# Altium PCB UPS.PcbDoc
Units mm, origin at the board's own origin, x right, y up, seen from the top; angles counter-clockwise.
Board outline 100 x 62 mm, 4 copper layers (Top Layer, PWR, GND, Bottom Layer), stack 0.568 mm thick; 105 components, 61 nets, 366 pads, 13 vias.
Unrouted connection lines stored in the file: 181.
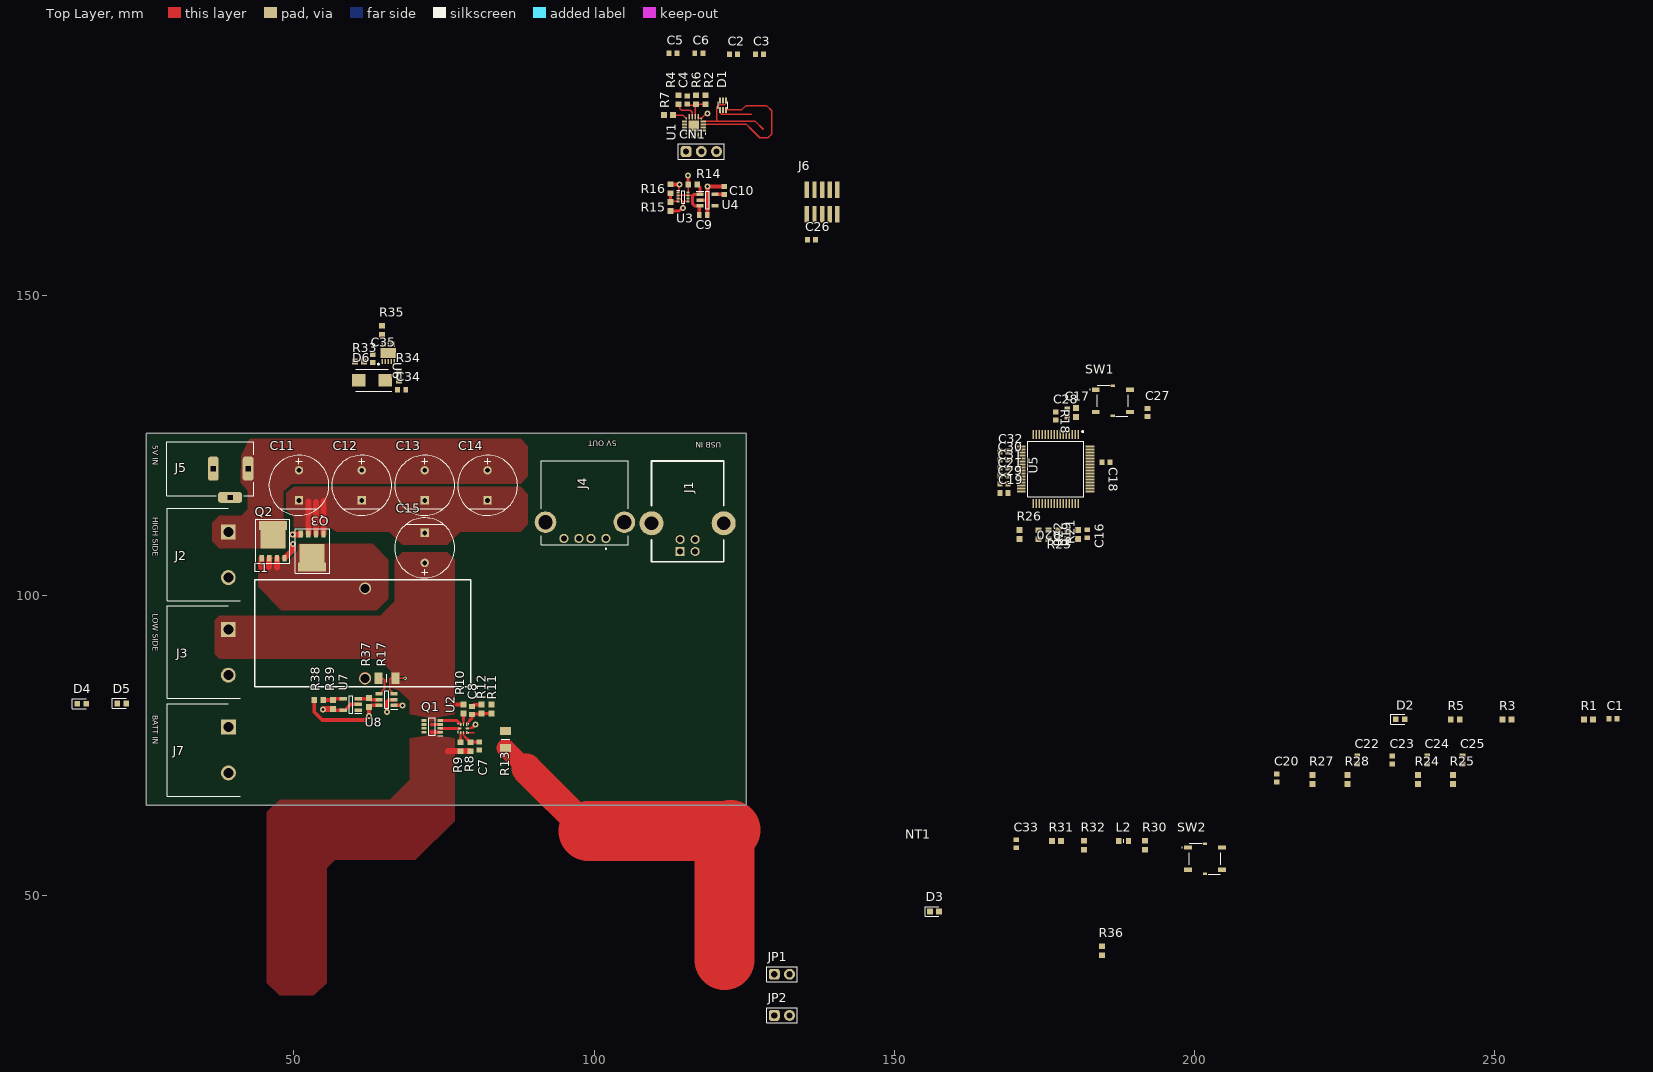
[diagram p0: Top Layer view]
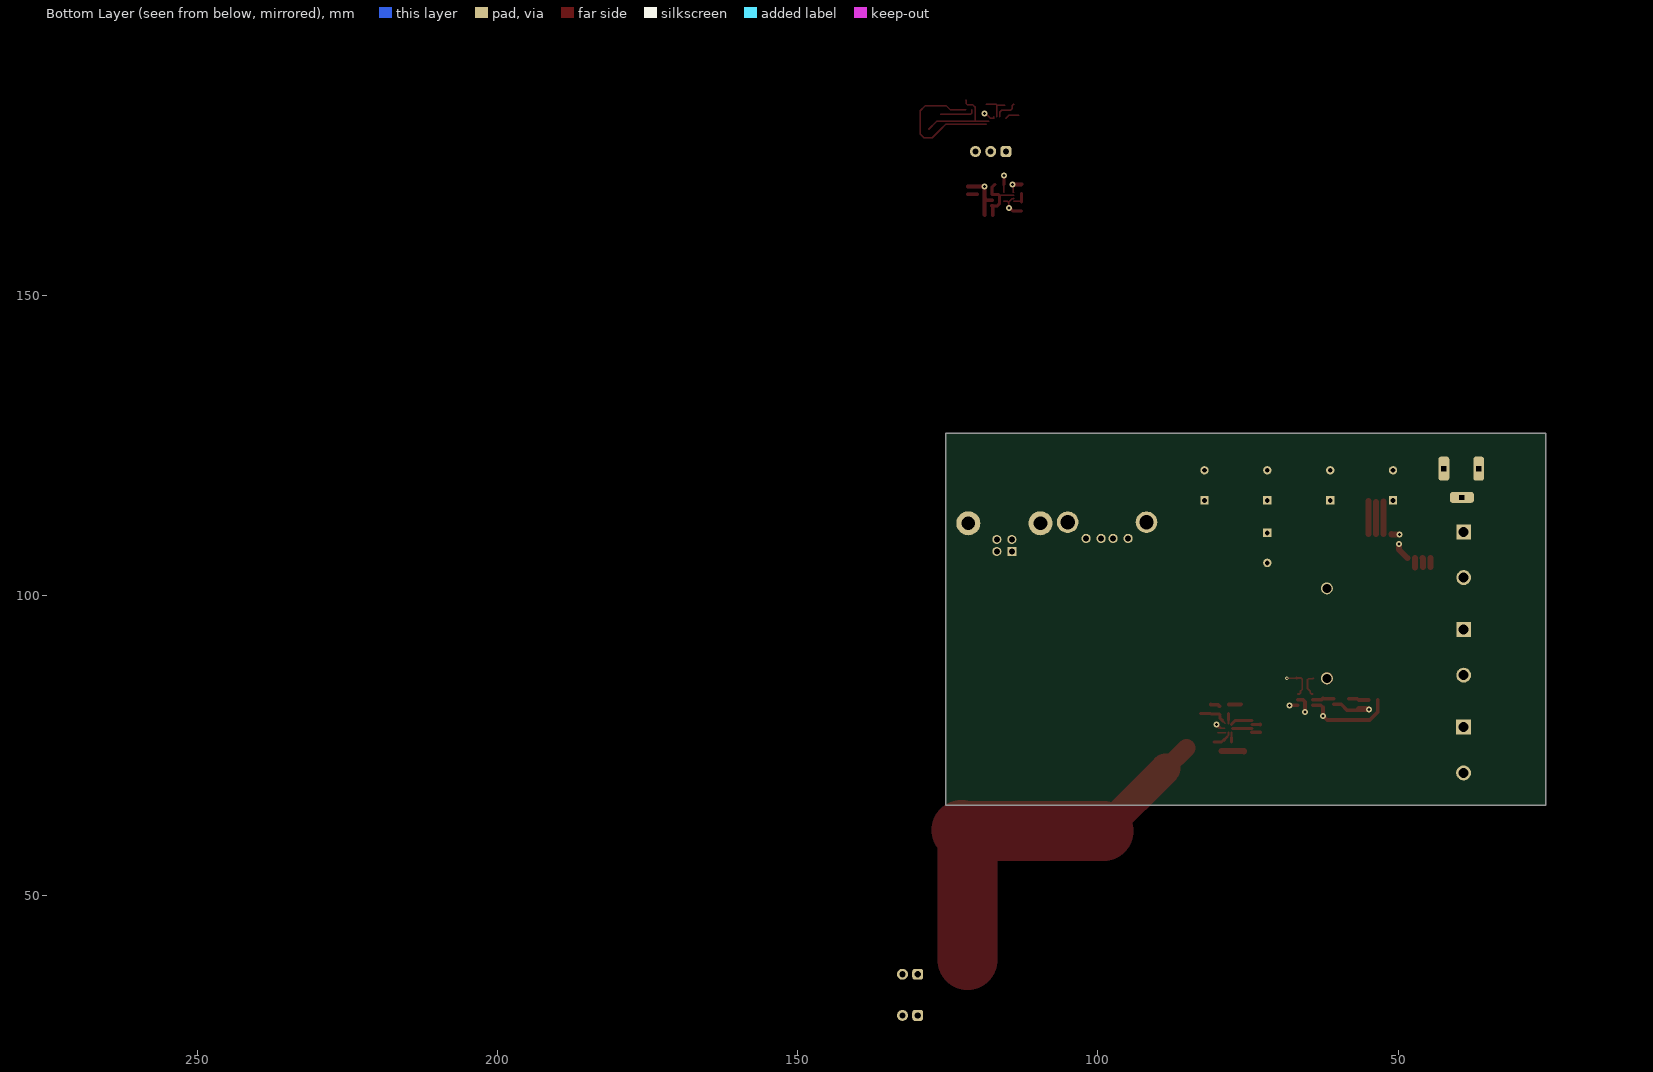
[diagram p1: Bottom Layer view, seen from below]
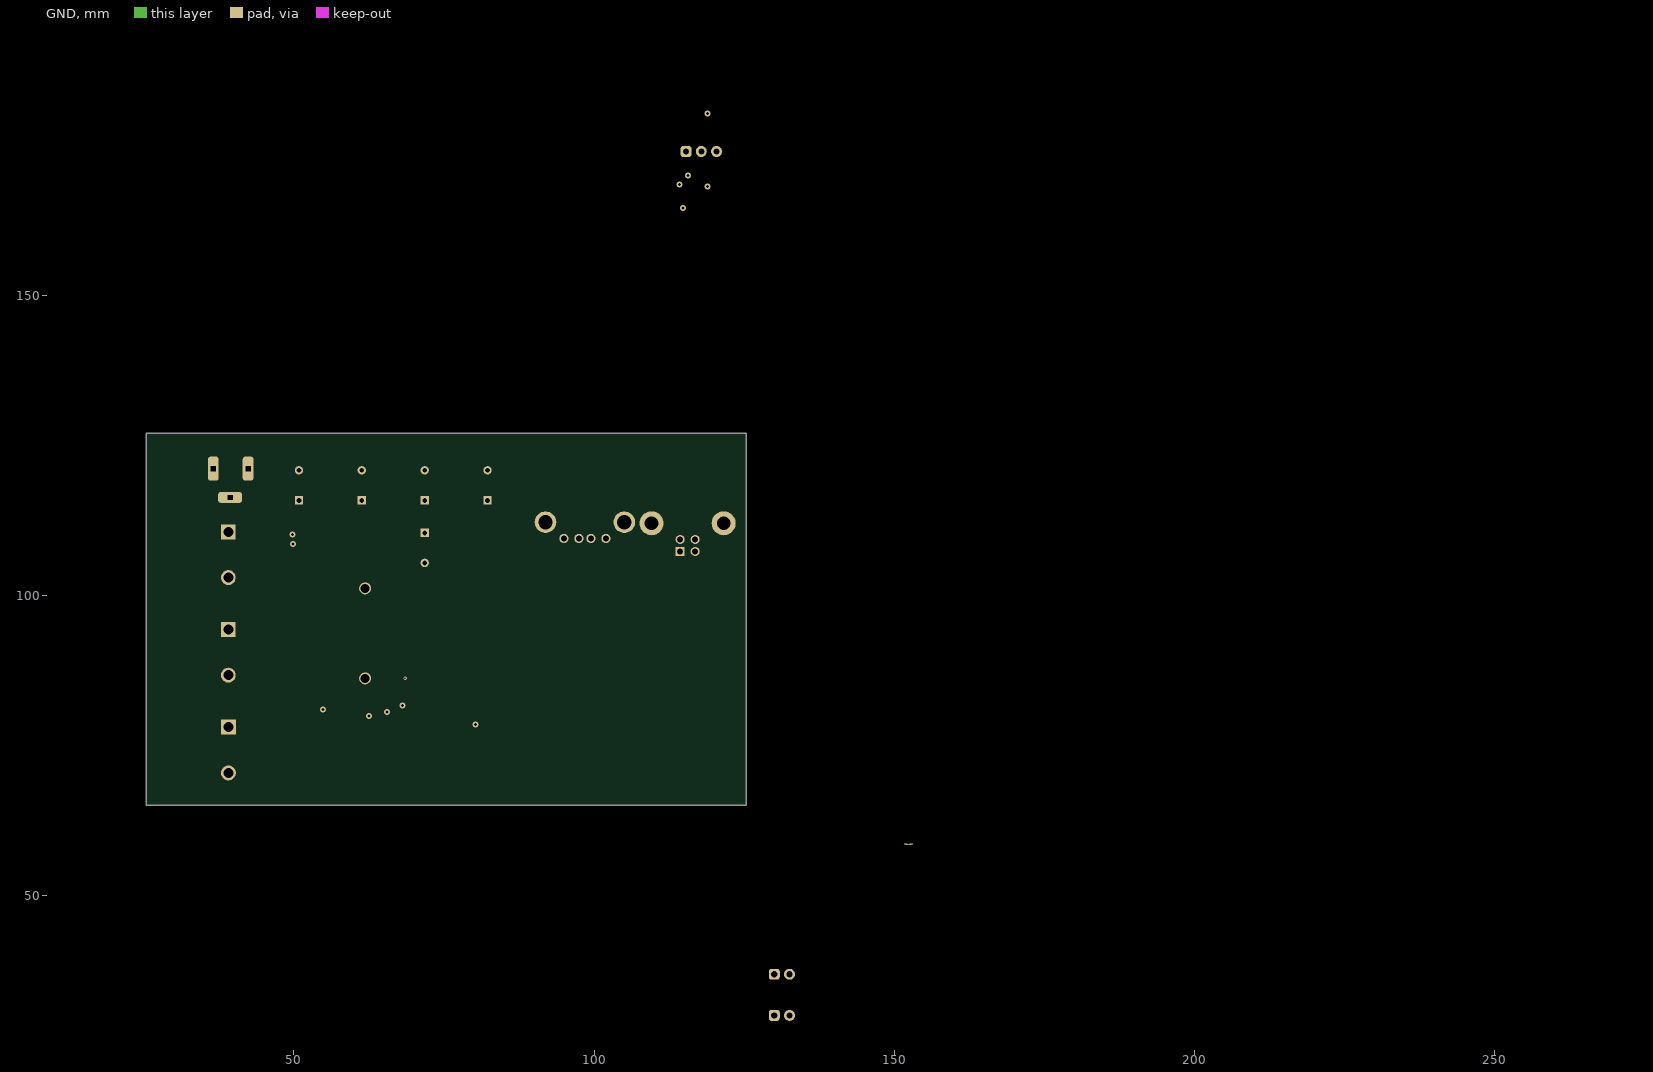
[diagram p2: GND]

## Layer stack, top to bottom
Top Solder: solder mask 0.0102, Solder Resist, Dk 3.5
Top Layer: signal copper 0.0356
Dielectric 2: prepreg 0.0711, PP-006, Dk 4.1
PWR: signal copper 0.0175
Dielectric 1: dielectric 0.32, FR-4, Dk 4.8
GND: signal copper 0.0175
Dielectric 3: prepreg 0.0711, PP-006, Dk 4.1
Bottom Layer: signal copper 0.0356
Bottom Solder: solder mask 0.0102, Solder Resist, Dk 3.5

## Board outline
25.4,65 25.4,127 125.4,127 125.4,65

## Design rules (kind name [scope] priority, off if disabled: settings)
Clearance [All] p1: gap=0.254 ignorepadtopadclearanceinfootprint=FALSE except(0.127: Arc-Arc Arc-Track Arc-SMDPad Track-Track Track-SMDPad SMDPad-SMDPad)
Height [All] p1: minheight=0 maxheight=40 prefheight=12.7
HoleSize [All] p1: absolutevalues=TRUE maxlimit=2.54 minlimit=0.3 maxpercent=80.000 minpercent=20.000
PlaneConnect [All] p1: planeconnectstyle=Direct reliefexpansion=0.508 reliefentries=4 reliefconductorwidth=0.254 reliefairgap=0.254
PolygonConnect [All] p1: connectstyle=Direct reliefconductorwidth=0.254 reliefentries=4 polygonreliefangle="90 Angle" airgapwidth=0.127
RoutingVias [All] p1: holewidth=0.5 width=0.75 viastyle="Through Hole" minholewidth=0.3 minwidth=0.5 maxholewidth=1 maxwidth=1.5
SolderMaskExpansion [All] p1: expansion=0.102 istentingtop=FALSE
SupplyNets "Schematic Supply Nets_10" [InNet('Vusb')] p1: voltage=0.000
SupplyNets "Schematic Supply Nets_9" [InNet('+3V3A')] p2: voltage=0.000
SupplyNets "Schematic Supply Nets_3" [InNet('+1V2')] p3: voltage=0.000
SupplyNets "Schematic Supply Nets_2" [InNet('AGND')] p4: voltage=0.000
SupplyNets "Schematic Supply Nets_8" [InNet('Vswitch')] p5: voltage=0.000
SupplyNets "Schematic Supply Nets_7" [InNet('+5V')] p6: voltage=0.000
SupplyNets "Schematic Supply Nets_6" [InNet('+3V3')] p7: voltage=0.000
SupplyNets "Schematic Supply Nets_1" [InNet('Vip')] p8: voltage=0.000
SupplyNets "Schematic Supply Nets_5" [InNet('Vbatt-')] p9: voltage=0.000
SupplyNets "Schematic Supply Nets_4" [InNet('Vbatt+')] p10: voltage=0.000
SupplyNets "Schematic Supply Nets" [InNet('GND')] p11: voltage=0.000
UnRoutedNet [All] p1: checkbadconnections=TRUE
Width [All] p1: maxlimit=10 minlimit=0.2 preferedwidth=0.254 midlayer1_minwidth=0.254 midlayer1_maxwidth=0.254 midlayer2_minwidth=0.254 midlayer2_maxwidth=0.254 minimp=50.000000 maximp=50.000000 favimp=50.000000
26 further rules are at their usual default settings.

## Classes and differential pairs
component class Designator: C11 C12 C13 C14 C15 C19 C20 C34 C35 D6 L1 Q2 Q3 R17 R24 R25 R27 R28 R33 R34 R35 R36 R37 R38 R39 U6 U7 U8

## Components (designator, comment, footprint, x,y, rotation, side; value= is the part's Value field where it differs from the comment)
C1 "4.7nF" CAP0603 269.777,79.423 r0 top
C2 "4.7uF" CAP0603 123.24,190.123 r0 top
C3 "100nF" CAP0603 127.558,190.123 r0 top
C4 "1uF" CAP0603 115.55,182.525 r270 top
C5 "4.7uF" CAP0603 113.144,190.323 r0 top
C6 "100nF" CAP0603 117.462,190.323 r0 top
C7 "100nF" CAP0603 80.875,74.85 r90 top
C8 "100nF" CAP0603 79.675,80.783 r270 top
C9 "1uF" CAP0603 118.2,163.35 r180 top
C10 "1uF" CAP0603 121.7,167.45 r270 top
C11 "RNU0J152MDN1PH" "Aluminium Capacitor 10x12.5" 45.878,113.3 r90 top value=1500uF
C12 "RNU0J152MDN1PH" "Aluminium Capacitor 10x12.5" 56.35,113.3 r90 top value=1500uF
C13 "RNU0J152MDN1PH" "Aluminium Capacitor 10x12.5" 66.825,113.3 r90 top value=1500uF
C14 "RNU0J152MDN1PH" "Aluminium Capacitor 10x12.5" 77.3,113.3 r90 top value=1500uF
C15 "470uF" "Aluminium Capacitor 10x12.5" 76.731,112.868 r270 top
C16 "4.7uF" CAP0603 182.2,110.225 r90 top
C17 "4.7uF" CAP0603 178.85,130.35 r270 top
C18 "4.7uF" CAP0603 185.305,122.125 r180 top
C19 "47nF" CAP0603 168.325,117.025 r0 top
C20 "47nF" CAP0603 213.77,69.517 r90 top
C21 "4.7uF" CAP0603 168.3,119.925 r0 top
C22 "4.7uF" CAP0603 227.185,72.503 r90 top
C23 "100nF" CAP0603 233.01,72.503 r90 top
C24 "100nF" CAP0603 238.86,72.503 r90 top
C25 "100nF" CAP0603 244.711,72.503 r90 top
C26 "100nF" CAP0603 136.225,159.2 r180 top
C27 "100nF" CAP0603 192.225,130.425 r90 top
C28 "4.7uF" CAP0603 176.925,129.87 r270 top
C29 "4.7nF" CAP0603 168.3,118.55 r0 top
C30 "4.7nF" CAP0603 168.3,122.575 r0 top
C31 "4.7nF" CAP0603 168.3,121.25 r0 top
C32 "4.7nF" CAP0603 168.325,123.925 r0 top
C33 "10uF" CAP0603 170.357,58.578 r90 top
C34 "1uF" CAP0603 67.95,134.225 r180 top
C35 "1uF" CAP0603 63.15,139.425 r270 top
CN1 "Pins 1x3" PIN-1X3 117.875,173.925 r0 top
D1 "ESDAULC6-3BP6" SOT-666 121.5,181.65 r0 top
D2 "Value" LED0603 234.344,79.296 r0 top
D3 "Value" LED0603 156.731,47.277 r0 top
D4 "Value" LED0603 14.632,81.903 r0 top
D5 "Value" LED0603 21.282,81.953 r0 top
D6 "Value" SMB 63,135.8 r180 top
J1 "USB-B" USB-B-FEMALE 115.6,107.275 r180 top
J2 "1766233" "GMSTBA 2,5/ 2-G-7,62" 39.059,110.54 r90 top
J3 "1766233" "GMSTBA 2,5/ 2-G-7,62" 39.059,94.284 r90 top
J4 "USB-A" USB-A-FEMALE 101.98,109.44 r180 top
J5 "DC Power Jack" "DC Power Jack Right Angled" 36.011,121.081 r270 top
J6 "FTSH-105-01-L-DV-K" CON-2x5-1.27 138.005,163.48 r0 top
J7 "1766233" "GMSTBA 2,5/ 2-G-7,62" 39.075,78 r90 top
JP1 "Jumper" PIN-1X2 131.306,36.827 r0 top
JP2 "Jumper" PIN-1X2 131.306,29.976 r0 top
L1 "Inductor" COIL_HANDMADE 61.85,93.625 r270 top value="174 uH"
L2 "Inductor" IND0603 188.258,59.053 r0 top value=10uH
NT1 "NetTie_1-1" NETTIE_1-1_0.2MM 152.4,58.525 r180 top net-tie value="NetTie 1-1 0.2mm"
Q1 "ECH8695R-TL-W" SOT-28FL 73.025,78.125 r180 top
Q2 "N-MOSFET" SOT-669-5 46.525,108.875 r0 top
Q3 "N-MOSFET" SOT-669-5 53.025,107.45 r180 top
R1 "1M" RES0603 265.713,79.296 r0 top
R2 "22K1" RES0603 118.575,182.55 r90 top
R3 "330R" RES0603 252.124,79.296 r0 top
R4 "1K" RES0603 114.05,182.55 r270 top
R5 "330R" RES0603 243.488,79.296 r0 top
R6 "47K5" RES0603 117,182.55 r270 top
R7 "10K" RES0603 112.425,179.975 r0 top
R8 "100R" RES0603 79.377,74.75 r270 top
R9 "20R" RES0603 77.75,74.75 r270 top
R10 "1K" RES0603 78.225,81.033 r90 top
R11 "100R" RES0603 82.875,81.033 r90 top
R12 "1K" RES0603 81.225,81.033 r270 top
R13 "0R005" RES1206 85.25,75.95 r90 top
R14 "10K" RES0603 116.45,168.45 r180 top
R15 "10K" RES0603 112.75,164.775 r270 top
R16 "10K" RES0603 112.75,167.7 r270 top
R17 "0R005" RES1206 65.5,86.15 r0 top
R18 "2K7" RES0603 180.325,130.425 r90 top
R19 "4K7" RES0603 180.625,110.1 r270 top
R20 "4K7" RES0603 178.925,110.1 r270 top
R21 "4K7" RES0603 177.325,110.075 r270 top
R22 "4K7" RES0603 175.75,110.05 r270 top
R23 "4K7" RES0603 174.1,110.05 r270 top
R24 "2K7" RES0603 237.265,69.263 r90 top
R25 "2K7" RES0603 243.107,69.263 r90 top
R26 "4K7" RES0603 170.925,110.1 r270 top
R27 "4K7" RES0603 219.739,69.263 r90 top
R28 "4K7" RES0603 225.581,69.263 r90 top
R30 "330R" RES0603 191.833,58.328 r90 top
R31 "330R" RES0603 177.057,59.053 r0 top
R32 "330R" RES0603 181.657,58.328 r90 top
R33 "5R" RES0603 60.925,138.925 r0 top
R34 "5R" RES0603 67.5,136.525 r270 top
R35 "5R" RES0603 64.7,144.125 r90 top
R36 "10K" RES0603 184.633,40.727 r90 top
R37 "100R" RES0603 62.5,82.1 r90 top
R38 "10K" RES0603 54.125,82.525 r180 top
R39 "10K" RES0603 56.525,81.775 r90 top
SW1 "PTS526 Button" "PTS526 SMG15J SMTR2 LFS" 186.45,132.375 r0 top
SW2 "PTS526 Button" "PTS526 SMG15J SMTR2 LFS" 201.808,56.077 r0 top
U1 "CP2102N-A02-GQFN20R" QFN-20 116.625,178.175 r180 top
U2 "BQ2980" X2QFN-8 78.25,77.8 r90 top
U3 "TPS2116" SOTFL50P160X60-8N 114.85,166.35 r0 top
U4 "LP5907QMFX-3.3Q1" SOT23-5 118.9,165.825 r0 top
U5 "F280038PMRQ1" LQFP-64 176.925,121.025 r270 top
U6 "DGD05473FN-7" V-DFN3030-10 65.725,140.35 r90 top
U7 "TV431" SOT23-5 59.475,81.8 r180 top
U8 "INA181A1" SOT23-6 65.45,82.6 r180 top

## Footprints (in the part's own frame and the unit in brackets; to place one, negate y for a bottom-side part, rotate by r counter-clockwise, add the part's x,y. Pads: shape width x height; smd on the part's side, far side on the other; paste and mask are expansions set on the pad)
"Aluminium Capacitor 10x12.5" [mm]
  rect 1.4x1.4 hole 0.8: 1(2.493,-4.953)
  round 1.4 hole 0.8: 2(7.493,-4.953)
  silkscreen extent -0.01,-9.95 9.99,0.04, body extent -0.02,-9.96 9.98,0.03, height 12.5
CAP0603 [mm] "1.6 x 0.8 x 0.8 mm"
  rect 0.81x0.94 smd: 1(-0.67,0) 2(0.67,0)
  body extent -0.8,-0.4 0.8,0.4, height 0.9
COIL_HANDMADE [mm] "35 x 15 mm coil"
  round 2 hole 1.5: 1(-7.5,0) 2(7.5,0)
  silkscreen extent -8.9,-18.4 8.9,17.6, body extent -8,-17.9 7.8,17.1, height 37.5
CON-2x5-1.27 [mm] "2x5 pin connector with 1.27 mm pitch"
  rect 0.74x2.79 smd: 1(-2.54,0) 2(-2.54,4.07) 3(-1.27,0) 4(-1.27,4.07) 5(0,0) 6(0,4.07) 7(1.27,0) 8(1.27,4.07) 9(2.54,0) 10(2.54,4.07)
  silkscreen extent -2.6,-2.25 -2.5,-2.15, body extent -3.17,-0.92 3.17,4.93, height 6.13
"DC Power Jack Right Angled" [mm] "DC Power Jack Right Angled(6.4)"
  rrect50% 4x1.8 hole 0.8 square: 1(0,6.35) 2(0,0.55)
  rrect50% 1.8x4 hole 0.8 square: 3(4.8,3.35)
  silkscreen extent -4.5,-7.25 4.5,7.25, body extent -4.5,-7.25 5,7.25, height 10.75
"GMSTBA 2,5/ 2-G-7,62" [mm] "Phoenix Xontact PCB header,"
  rect 2.475x2.475 hole 1.65: 1(0,0)
  round 2.475 hole 1.65: 2(-7.62,0)
  silkscreen extent -11.48,-2 3.91,10.15, body extent -11.41,-1.92 3.83,10.08, height 8.9
IND0603 [mm]
  rect 0.9x1 smd: 1(-0.8,0) 2(0.8,0)
  silkscreen extent 0,-0.3 0,0.3, body extent -0.8,-0.4 0.8,0.4, height 0.95
LED0603 [mm] "LEDC1608X80N"
  rect 0.95x0.95 smd: 1(-0.75,0) 2(0.75,0)
  silkscreen extent -1.58,-0.82 0.75,0.82, body extent -0.83,-0.4 0.77,0.4, height 0.7
LQFP-64 [mm] "QFP50P1200X1200X160-64N"
  rect 1.475x0.3 smd: 1(-5.738,3.75) 2(-5.738,3.25) 3(-5.738,2.75) 4(-5.738,2.25) 5(-5.738,1.75) 6(-5.738,1.25) 7(-5.738,0.75) 8(-5.738,0.25) 9(-5.738,-0.25) 10(-5.738,-0.75) 11(-5.738,-1.25) 12(-5.738,-1.75) 13(-5.738,-2.25) 14(-5.738,-2.75) 15(-5.738,-3.25) 16(-5.738,-3.75) 33(5.738,-3.75) 34(5.738,-3.25) 35(5.738,-2.75) 36(5.738,-2.25) 37(5.738,-1.75) 38(5.738,-1.25) 39(5.738,-0.75) 40(5.738,-0.25) 41(5.738,0.25) 42(5.738,0.75) 43(5.738,1.25) 44(5.738,1.75) 45(5.738,2.25) 46(5.738,2.75) 47(5.738,3.25) 48(5.738,3.75)
  rect 0.3x1.475 smd: 17(-3.75,-5.738) 18(-3.25,-5.738) 19(-2.75,-5.738) 20(-2.25,-5.738) 21(-1.75,-5.738) 22(-1.25,-5.738) 23(-0.75,-5.738) 24(-0.25,-5.738) 25(0.25,-5.738) 26(0.75,-5.738) 27(1.25,-5.738) 28(1.75,-5.738) 29(2.25,-5.738) 30(2.75,-5.738) 31(3.25,-5.738) 32(3.75,-5.738) 49(3.75,5.738) 50(3.25,5.738) 51(2.75,5.738) 52(2.25,5.738) 53(1.75,5.738) 54(1.25,5.738) 55(0.75,5.738) 56(0.25,5.738) 57(-0.25,5.738) 58(-0.75,5.738) 59(-1.25,5.738) 60(-1.75,5.738) 61(-2.25,5.738) 62(-2.75,5.738) 63(-3.25,5.738) 64(-3.75,5.738)
  silkscreen extent -6.35,-4.65 4.65,4.65, body extent -6.01,-6.01 6.01,6.01, height 1.5
NETTIE_1-1_0.2MM [mm]
  rrect5% 0.6x0.2 on Mid2 paste-0.45 mask-0.45: 1(-0.45,0) 2(0.45,0)
  GND lines w0.2: 0.45,0 -0.45,0
PIN-1X2 [mil] "2.54mm"
  rrect50% 72x72 hole 40: 1(-50,0)
  round 72 hole 40: 2(50,0)
  silkscreen extent -100,-50 100,50, body extent -96,-48 104,50, height 323
PIN-1X3 [mil] "2.54mm"
  rrect50% 72x72 hole 40: 1(-100,0)
  round 72 hole 40: 2(0,0) 3(100,0)
  silkscreen extent -150,-50 150,50, body extent -146,-49 154,49, height 323
"PTS526 SMG15J SMTR2 LFS" [mm] "Tactile Switches 50mA 12VDC, 5.2x5.2mm, 1.5mm H, metal actuator"
  rect 1.3x0.7 smd: 1(-2.85,1.85) 1(2.85,1.85) 2(-2.85,-1.85) 2(2.85,-1.85)
  rect 0.7x0.4 smd: 3(0,-2.5) 3(0,2.5)
  silkscreen extent -3.85,-2.6 2.6,2.6, body extent -3.2,-2.6 3.2,2.6, height 1.7
QFN-20 [mm]
  rect 0.3x0.3 smd: 1(-1.25,1.25) 6(-1.25,-1.25) 11(1.25,-1.25) 16(1.25,1.25)
  rect 0.9x0.3 smd: 2(-1.55,0.75) 3(-1.55,0.25) 4(-1.55,-0.25) 5(-1.55,-0.75) 12(1.55,-0.75) 13(1.55,-0.25) 14(1.55,0.25) 15(1.55,0.75)
  rect 0.3x0.9 smd: 7(-0.75,-1.55) 8(-0.25,-1.55) 9(0.25,-1.55) 10(0.75,-1.55) 17(0.75,1.55) 18(0.25,1.55) 19(-0.25,1.55) 20(-0.75,1.55)
  rect 1.8x1.8 smd: 21(0,0)
  silkscreen extent -2,1.25 -1.9,1.35, body extent -1.5,-1.5 1.5,1.5, height 0.75
RES0603 [mm] "Resistor 0603 (1608 metric)"
  rect 0.95x1 smd: 1(-0.75,0) 2(0.75,0)
  body extent -0.76,-0.43 0.76,0.43, height 0.45
RES1206 [mm]
  rect 1.35x1.85 smd: 1(-1.4,0) 2(1.4,0)
  silkscreen extent 0,-0.7 0,0.7, body extent -1.6,-0.8 1.6,0.8, height 0.65
SMB [mm] "DO-214AA"
  rect 2.2x2.15 smd: 1(-2.2,0) 2(2.2,0)
  silkscreen extent -3.27,-1.81 2.7,1.81, body extent -2.7,-1.81 2.7,1.81, height 2.44
SOT23-5 [mm]
  rect 1.2x0.6 smd: 1(-1.25,0.95) 2(-1.25,0) 3(-1.25,-0.95) 4(1.25,-0.95) 5(1.25,0.95)
  silkscreen extent -1.85,-1.45 0.3,1.5, body extent -1.4,-1.45 1.4,1.45, height 1.45
SOT23-6 [mm]
  rect 1.15x0.6 smd: 1(-1.25,0.95) 2(-1.25,0) 3(-1.25,-0.95) 4(1.25,-0.95) 5(1.25,0) 6(1.25,0.95)
  silkscreen extent -1.83,-1.45 0.33,1.6, body extent -1.4,-1.45 1.4,1.45, height 1.45
SOT-28FL [mm] "SOT-28FL / ECH8 / SOT65P280X95-8N"
  rect 0.9x0.45 smd: 1(-1.35,0.975) 2(-1.35,0.325) 3(-1.35,-0.325) 4(-1.35,-0.975) 5(1.35,-0.975) 6(1.35,-0.325) 7(1.35,0.325) 8(1.35,0.975)
  silkscreen extent -1.8,-1.45 0.55,1.55, body extent -1.4,-1.45 1.4,1.45, height 0.95
SOT-666 [mm]
  rect 0.3x0.99 smd: 1(-0.5,-0.805) 2(0,-0.805) 3(0.5,-0.805) 4(0.5,0.805) 5(0,0.805) 6(-0.5,0.805)
  silkscreen extent -0.8,-0.6 0.8,0.6, body extent -0.8,-1.27 0.8,1.27, height 0.7
SOT-669-5 [mm] "LFPAK56; PowerSO8 (SOT669)"
  rect 0.7x1.15 smd: 1(1.905,-2.725) 2(-1.905,-2.725) 2(-0.635,-2.725) 2(0.635,-2.725)
  rect 4.2x3.1 smd: 3(0,0.45)
  rect 4.7x1.5 smd: 3(0,2.75)
  silkscreen extent -2.9,-3.6 2.8,3.8, body extent -2.4,-2.81 2.4,3.3, height 1
SOTFL50P160X60-8N [mm]
  rect 0.475x0.3 smd: 1(-0.838,0.75) 2(-0.838,0.25) 3(-0.838,-0.25) 4(-0.838,-0.75) 5(0.838,-0.75) 6(0.838,-0.25) 7(0.838,0.25) 8(0.838,0.75)
  silkscreen extent -1.07,-1.05 0.25,1.15, body extent -0.8,-1.05 0.8,1.05, height 0.6
USB-A-FEMALE [mm] "SS-52100-001"
  round 1.53 hole 1.02: 1(0,0) 2(2.5,0) 3(4.5,0) 4(7,0)
  round 3.6 hole 2.4: 5(-3.07,-2.71) 5(10.07,-2.71)
  silkscreen extent -3.75,-12.99 10.75,1.81, body extent -4.5,-13 11.5,1, height 7.61
USB-B-FEMALE [mm]
  round 4 hole 2.3: 0(-6,-4.7) 0(6,-4.7)
  rect 1.5x1.5 hole 1: 1(1.25,0)
  round 1.5 hole 1: 2(-1.25,0) 3(-1.25,-2) 4(1.25,-2)
  silkscreen extent -6,-15.1 6,1.7, body extent -7.44,-15 7.44,2, height 11
V-DFN3030-10 [mm] "V-DFN3030-10, SON50P300X300X80-11N-D / For DGD05473 IC"
  rect 0.85x0.3 smd: 1(-1.45,1) 2(-1.45,0.5) 3(-1.45,0) 4(-1.45,-0.5) 5(-1.45,-1) 6(1.45,-1) 7(1.45,-0.5) 8(1.45,0) 9(1.45,0.5) 10(1.45,1)
  rect 1.65x2.6 smd: 11(0,0)
  silkscreen extent -2,1.52 -1.75,1.77, body extent -1.55,-1.5 1.55,1.5, height 0.8
X2QFN-8 [mm] "QFN, 8-Leads, Body 1.5x1.5mm, Pitch 0.5mm, TI Recommended"
  rrect40% 0.55x0.25 smd: 1(-0.675,0.5) 3(-0.675,-0.5) 5(0.675,-0.5) 7(0.675,0.5)
  rrect50% 0.55x0.2 smd: 2(-0.675,0) 6(0.675,0)
  rrect33% 0.3x0.6 smd: 4(0,-0.65) 8(0,0.65)
  silkscreen extent -0.85,-0.87 0.85,0.87, body extent -0.78,-0.78 0.77,0.77, height 0.41

## Part data
C1 C2 C3 C4 C5 C6 C7 C8 C9 C10 C16 C17 C18 C19 C20 C21 C22 C23 C24 C25 C26 C27 C28 C29 C30 C31 C32 C34 C35: "Capacitor"
C11 C12 C13 C14: "Aluminum Electrolytic Capacitor, Polarized, Aluminum (solid Polymer), 6.3V, 20% +Tol, 20% -Tol, 1500uF, Through Hole Mount", Capacitor Type=Aluminium, ESR (Equivalent Series Resistance)=7mR, Leakage Current=1.89mA, Manufacturer=Nichicon, Manufacturer Series=NU, Max Operating Temperature=105°C, Min Operating Temperature=-55°C, Package Shape=Cylindrical, Package Style=RadialMeter, Rated DC Voltage (URdc)=6.3V, Ripple Current=6.1A, Supplier Part Number=4133684, Tolerance  (fill in as +-)=20%, Category="Polymer Capacitors", ComponentLink1Description=https://datasheet.ciiva.com:443/pdfs/VipMasterIC/IC/NICH/NICH-S-A0001375683/NICH-S-A0001375683-1.pdf?src-supplier=IHS+Markit, ComponentLink1URL=https://datasheet.ciiva.com:443/pdfs/VipMasterIC/IC/NICH/NICH-S-A0001375683/NICH-S-A0001375683-1.pdf?src-supplier=IHS+Markit, ComponentLink2Description=https://datasheet.ciiva.com/6316/2013fpcap-catalog-nu-6316953.pdf?src-supplier=Digikey, ComponentLink2URL=https://datasheet.ciiva.com/6316/2013fpcap-catalog-nu-6316953.pdf?src-supplier=Digikey, ComponentLink3Description=https://datasheet.ciiva.com/6316/2013fpcap-catalog-nu-6316955.pdf?src-supplier=Digikey, ComponentLink3URL=https://datasheet.ciiva.com/6316/2013fpcap-catalog-nu-6316955.pdf?src-supplier=Digikey, Diameter=10mm, Dielectric Material=Aluminium, JESD-609 Code=e3, Length=12.5mm, Manufacturer Part Number=RNU0J152MDN1PH, Mounting Technology="Through Hole", Packaging="Tape and Reel", Pins=2, Polarity=Polarized, Pricing="500=0.37, 1000=0.36, 2000=0.35, 2500=0.35, 7500=0.335 (USD)", Reach SVHC Compliant=Yes, RoHS=Yes, RoHS Compliant=Yes, Series=NU, Stock=1000, Supplier="Future Electronics", Tan Delta=0.08, Terminal Finish=Tin, Terminal Pitch=5mm, Termination=Wire, Tolerance (fill in as +-)=20%
C15: library part RR50J471MDN1KX, "Aluminum Electrolytic Capacitor, Aluminum (solid Polymer)", Capacitor Type=Aluminium, Manufacturer=Nichicon, Supplier Part Number=647-RR50J471MDN1KX, Category="Polymer Capacitors", ComponentLink1Description=https://datasheet.ciiva.com:443/pdfs/VipMasterIC/IC/NICH/NICH-S-A0003527494/NICH-S-A0003527494-1.pdf?src-supplier=IHS+Markit, ComponentLink1URL=https://datasheet.ciiva.com:443/pdfs/VipMasterIC/IC/NICH/NICH-S-A0003527494/NICH-S-A0003527494-1.pdf?src-supplier=IHS+Markit, ComponentLink2Description=http://www.mouser.com/ds/2/293/e-rr5-875910.pdf?src-supplier=Mouser, ComponentLink2URL=http://www.mouser.com/ds/2/293/e-rr5-875910.pdf?src-supplier=Mouser, ComponentLink3Description=http://nichicon-us.com/english/products/pdfs/e-rr5.pdf?src-supplier=Digikey, ComponentLink3URL=http://nichicon-us.com/english/products/pdfs/e-rr5.pdf?src-supplier=Digikey, Dielectric Material=Aluminium, Manufacturer Part Number=RR50J471MDN1KX, Pins=2, Pricing="1=0.65, 10=0.409, 50=0.409, 100=0.334, 1000=0.265, 10000=0.265 (USD)", Reach SVHC Compliant=Yes, RoHS=Yes, RoHS Compliant=Yes, Stock=272, Supplier=Mouser
C33: "Ceramic Capacitor, Multilayer, Ceramic, 6.3V, 20% +Tol, 20% -Tol, X5R, 15% TC, 10uF, Surface Mount, 0603", Capacitor Type=Ceramic, Case/Package=0603, Manufacturer=Samsung, Manufacturer Part Number=CL10A106MQ8NNND, Max Operating Temperature=85°C, Min Operating Temperature=-55°C, Package Shape=Rectangular, Package Style=SMTMeter, Rated DC Voltage (URdc)=6.3V, Supplier Part Number=187-CL10A106MQ8NNND, Temperature Characteristics Code=X5R, Tolerance  (fill in as +-)=20%, Category="Ceramic Capacitors", ComponentLink1Description=https://datasheet.ciiva.com:443/pdfs/VipMasterIC/IC/SEMS/SEMS-S-A0008522793/SEMS-S-A0008522909-1.pdf?src-supplier=IHS+Markit, ComponentLink1URL=https://datasheet.ciiva.com:443/pdfs/VipMasterIC/IC/SEMS/SEMS-S-A0008522793/SEMS-S-A0008522909-1.pdf?src-supplier=IHS+Markit, Dielectric Material=Ceramic, Height=0.8mm, JESD-609 Code=e3, Length=1.6mm, Mounting Technology="Surface Mount", Multilayer=Yes, Packaging="Tape and Reel", Pins=2, Pricing="1=0.1, 10=0.066, 50=0.066, 100=0.031, 1000=0.019, 10000=0.014 (USD)", Reach SVHC Compliant=Yes, RoHS=Yes, RoHS Compliant=Yes, Stock=103768, Supplier=Mouser, Terminal Finish=Nickel, Termination=Wraparound, Tolerance (fill in as +-)=20%, Width=0.8mm
CN1: "1x3 2.54mm", Package="SMD 1.27mm", CompType=M50-3530342, Distributor=Mouser, Order Code=855-M50-3530342, Part Class=Connector
D1: "TVS Diode (Bi-directional)", Manufacturer_Name=STMicroelectronics, Mouser Part Number=511-ESDAULC63BP6, Arrow Part Number=ESDAULC6-3BP6, Arrow Price/Stock=https://www.arrow.com/en/products/esdaulc6-3bp6/stmicroelectronics?region=europe, Datasheet Link=https://www.st.com/resource/en/datasheet/esdaulc6-3bp6.pdf, Height=0.6mm, Manufacturer_Part_Number=ESDAULC6-3BP6, Mouser Price/Stock=https://www.mouser.co.uk/ProductDetail/STMicroelectronics/ESDAULC6-3BP6?qs=eU2TTeT5rM3P6hIT2KJeMw%3D%3D
D2 D3 D4 D5: library part "LED Green", "Single Color LED, Bright Green, Water Clear, 1.1mm", Color=Green, Forward Current=30mA, Manufacturer="Wurth Electronics", Manufacturer Part Number=150060VS75000, Max Operating Temperature=85°C, Min Operating Temperature=-40°C, Supplier Part Number=710-150060VS75000, Category=LEDs, Channels=1, ComponentLink1Description=https://datasheet.ciiva.com:443/pdfs/VipMasterIC/IC/MIDC/MIDC-S-A0007768636/MIDC-S-A0007768636-1.pdf?src-supplier=IHS+Markit, ComponentLink1URL=https://datasheet.ciiva.com:443/pdfs/VipMasterIC/IC/MIDC/MIDC-S-A0007768636/MIDC-S-A0007768636-1.pdf?src-supplier=IHS+Markit, ComponentLink2Description=https://datasheet.ciiva.com/29562/150060vs75000-29562919.pdf?src-supplier=Digikey, ComponentLink2URL=https://datasheet.ciiva.com/29562/150060vs75000-29562919.pdf?src-supplier=Digikey, Lens Style="WATER CLEAR", Luminous Intensity-Nom=40mcd, Mounting Technology="Surface Mount", Optoelectronic Device Type="SINGLE COLOR LED", Overall Height=0.7mm, Packaging="Tape and Reel", Pins=2, Pricing="1=0.15, 10=0.15, 50=0.142, 100=0.122, 1000=0.116, 10000=0.116 (USD)", Reach SVHC Compliant=Yes, RoHS=Yes, RoHS Compliant=Yes, Shape=Rectangular, Size=1.1mm, Stock=96633, Supplier=Mouser, Terminal Pitch=1.6mm, Viewing Angle=140°
D6: library part VS-MBRS130L-M3/5BT, "Rectifier Diode, Schottky, 1 Phase, 1 Element, 30V V(RRM), Silicon", Manufacturer="Vishay Semiconductors", Max Operating Temperature=125°C, Min Operating Temperature=-55°C, Package Body Material=Plastic, Package Shape=Rectangular, Package Style="SMALL OUTLINEMeter", Rep Pk Reverse Voltage-Max=30V, Supplier Part Number=78-VS-MBRS130L-M35BT, Additional Feature="FREE WHEELING DIODE", Category="Rectifier Diodes", ComponentLink1Description=https://datasheet.ciiva.com:443/pdfs/VipMasterIC/IC/VISH/VISH-S-A0001785244/VISH-S-A0001785244-1.pdf?src-supplier=IHS+Markit, ComponentLink1URL=https://datasheet.ciiva.com:443/pdfs/VipMasterIC/IC/VISH/VISH-S-A0001785244/VISH-S-A0001785244-1.pdf?src-supplier=IHS+Markit, ComponentLink2Description=http://www.mouser.com/ds/2/427/vsmbrs130lm3-552915.pdf?src-supplier=Mouser, ComponentLink2URL=http://www.mouser.com/ds/2/427/vsmbrs130lm3-552915.pdf?src-supplier=Mouser, ComponentLink3Description=http://www.vishay.com/docs/95745/vsmbrs130lm3.pdf?src-supplier=Digikey, ComponentLink3URL=http://www.vishay.com/docs/95745/vsmbrs130lm3.pdf?src-supplier=Digikey, ComponentLink4Description=https://datasheet.octopart.com/VS-MBRS130L-M3-5BT-Vishay-datasheet-41960962.pdf?src-supplier=Future+Electronics, ComponentLink4URL=https://datasheet.octopart.com/VS-MBRS130L-M3-5BT-Vishay-datasheet-41960962.pdf?src-supplier=Future+Electronics, Diode Element Material=SILICON, Diode Type=RECTIFIER, If="1 A", JESD-30 Code=R-PDSO-C2, JESD-609 Code=e3, Manufacturer Part Number=VS-MBRS130L-M3/5BT, Moisture Sensitivity Level=1, Number of Elements=1, Pins=2, Pricing="1=0.26, 10=0.211, 50=0.211, 100=0.15, 1000=0.105, 10000=0.08 (USD)", Reach SVHC Compliant=No, RoHS=Yes, RoHS Compliant=Yes, Stock=107658, Supplier=Mouser, Surface Mount=Yes, Technology=SCHOTTKY, Terminal Finish=Tin, Terminal Form="C BEND", Terminal Position=DUAL, Vf="300 mV", Vrrm="30 V"
J1: "USB Connector"
J2 J3 J7: "Phoenix Contact", Mouser Part Number=651-1766233, Arrow Part Number=1766233, Arrow Price/Stock=https://www.arrow.com/en/products/1766233/phoenix-contact?region=nac, Datasheet Link=http://www.phoenixcontact.com/de/produkte/1766233/pdf, Height=7.67mm, Manufacturer_Name="Phoenix Contact", Manufacturer_Part_Number=1766233, Mouser Price/Stock=https://www.mouser.co.uk/ProductDetail/Phoenix-Contact/1766233?qs=nFvZQsPh5NH5GN9WWXVfYg%3D%3D
J4: "USB Connector", Manufacturer=Bel, Manufacturer Part Number=SS-52100-001, Supplier Part Number=530-SS-52100-001, Category=Connectors, ComponentLink1Description=https://datasheet.ciiva.com:443/pdfs/VipMasterIC/IC/BELF/BELF-S-A0007110717/BELF-S-A0007110717-1.pdf?src-supplier=IHS+Markit, ComponentLink1URL=https://datasheet.ciiva.com:443/pdfs/VipMasterIC/IC/BELF/BELF-S-A0007110717/BELF-S-A0007110717-1.pdf?src-supplier=IHS+Markit, ComponentLink2Description=http://www.farnell.com/datasheets/2813579.pdf?src-supplier=Farnell, ComponentLink2URL=http://www.farnell.com/datasheets/2813579.pdf?src-supplier=Farnell, ComponentLink3Description=https://belfuse.com/resources/drawings/stewartconnector/dr-stw-ss-52100-001.pdf?src-supplier=Digikey, ComponentLink3URL=https://belfuse.com/resources/drawings/stewartconnector/dr-stw-ss-52100-001.pdf?src-supplier=Digikey, ComponentLink4Description=http://www.farnell.com/datasheets/2813579.pdf?src-supplier=Newark, ComponentLink4URL=http://www.farnell.com/datasheets/2813579.pdf?src-supplier=Newark, ComponentLink5Description=https://datasheet.octopart.com/SS-52100-001-Bel-Fuse-datasheet-137355466.pdf?src-supplier=Sager+Electronics, ComponentLink5URL=https://datasheet.octopart.com/SS-52100-001-Bel-Fuse-datasheet-137355466.pdf?src-supplier=Sager+Electronics, Pricing="1=0.57, 10=0.346, 50=0.346, 100=0.286, 1000=0.252, 10000=0.252 (USD)", RoHS=Yes, RoHS Compliant=Yes, Stock=6440, Supplier=Mouser
J5: "CIRCULAR DC POWER CONNECTOR", Manufacturer="Wurth Electronics", Manufacturer Part Number=694106301002, Supplier Part Number=1224879, Category="Power Connectors", ComponentLink1Description=https://datasheet.ciiva.com:443/pdfs/VipMasterIC/IC/MIDC/MIDC-S-A0001192814/MIDC-S-A0001192814-1.pdf?src-supplier=IHS+Markit, ComponentLink1URL=https://datasheet.ciiva.com:443/pdfs/VipMasterIC/IC/MIDC/MIDC-S-A0001192814/MIDC-S-A0001192814-1.pdf?src-supplier=IHS+Markit, ComponentLink2Description=http://www.mouser.com/ds/2/445/6941xx301002-469315.pdf?src-supplier=Mouser, ComponentLink2URL=http://www.mouser.com/ds/2/445/6941xx301002-469315.pdf?src-supplier=Mouser, ComponentLink3Description=http://www.farnell.com/cad/2130967.pdf?src-supplier=Element14, ComponentLink3URL=http://www.farnell.com/cad/2130967.pdf?src-supplier=Element14, ComponentLink4Description=https://katalog.we-online.de/em/datasheet/6941xx301002.pdf?src-supplier=Digikey, ComponentLink4URL=https://katalog.we-online.de/em/datasheet/6941xx301002.pdf?src-supplier=Digikey, Connector Type=Circular,Power, Contact Finish - Mating="NOT SPECIFIED", Reach SVHC Compliant=Yes, RoHS=Yes, RoHS Compliant=Yes, Stock=1650, Supplier=Rs
J6: library part Connector_10Pin, "Smt Micro Header", Current capacity=3.4A, Manufacturer=Samtec, Max Operating Temperature=125°C, Max Voltage=0V, Min Operating Temperature=-55°C, Package=SMD, CompType=FTSH-105-01-L-DV-K, Connector Type=Header, Distributor=Mouser, Gender=Male, Mounting Technology=SMD, Order Code=200-FTSH10501LDVK, Pins=10, RoHS Compliant=Yes, Safety Related=No
JP1 JP2: "2 pin jumper connection"
L1: "Hand made inductance"
L2: library part 10uH, "General Purpose Inductor, 10uH, 20%, SMD 0603", Case/Size Code=1608, DC Resistance (DCR)=900mR, Inductor Application="POWER INDUCTOR", Inductor Type="GENERAL PURPOSE INDUCTOR", Manufacturer=TDK, Manufacturer Part Number=MLZ1608E100MT000, Manufacturer Series=MLZ, Max Current Rating=40mA, Max Operating Temperature=125°C, Min Operating Temperature=-55°C, Self Resonant Frequency=30MHz, Test Frequency=2MHz, Tolerance=20%, Category="Fixed Inductors", Channels=1, ComponentLink1Description=https://datasheet.ciiva.com:443/pdfs/VipMasterIC/IC/TDKC/TDKCS07657/TDKCS07657-1.pdf?src-supplier=IHS+Markit, ComponentLink1URL=https://datasheet.ciiva.com:443/pdfs/VipMasterIC/IC/TDKC/TDKCS07657/TDKCS07657-1.pdf?src-supplier=IHS+Markit, Inductance-Nom (L)=10uH, JESD-609 Code=e3, Pins=2, Pricing="783=0.0324 (USD)", Reach SVHC Compliant=Yes, RoHS=Yes, RoHS Compliant=Yes, Shape/Size Description="RECTANGULAR PACKAGE", Shielding=Shielded, Stock=783, Supplier="Arrow Electronics", Supplier Part Number=MLZ1608E100MT000, Surface Mount=Yes, Terminal Finish=Tin, Terminal Placement="Dual Ended", Termination=Wraparound
NT1: "NetTie 1 -> 1", ID=22, Inventory_Category=Other, Part Class=NetTie, Technology=SMT
Q1: "1-2 Cells Lithium-ion Battery Protection", Manufacturer_Name=onsemi, Mouser Part Number=863-ECH8695R-TL-W, Arrow Part Number=ECH8695R-TL-W, Arrow Price/Stock=https://www.arrow.com/en/products/ech8695r-tl-w/on-semiconductor?region=europe, Datasheet Link=https://datasheet.datasheetarchive.com/originals/distributors/DKDS-17/338047.pdf, Height=0.95mm, Manufacturer_Part_Number=ECH8695R-TL-W, Mouser Price/Stock=https://www.mouser.co.uk/ProductDetail/ON-Semiconductor/ECH8695R-TL-W?qs=dbuNSGnowt2koJiK%2FkW5Eg%3D%3D
Q2 Q3: library part PSMN1R2-25YLDX, "Power Field-Effect Transistor, 100A I(D), 25V, 0.00169ohm, 1-Element, N-Channel, Silicon, Metal-oxide Semiconductor FET, MO-235", Avalanche Energy Rating (Eas)=1293mJ, Case Connection=DRAIN, Drain Current-Max (ID)=100A, Drain-source On Resistance-Max=1.69mR, DS Breakdown Voltage-Min=25V, Manufacturer=Nexperia, Operating Mode="ENHANCEMENT MODE", Package Body Material=Plastic, Package Shape=Rectangular, Package Style="SMALL OUTLINEMeter", Pulsed Drain Current-Max (IDM)=1.163kA, Supplier Part Number=771-PSMN1R2-25YLDX, Additional Feature="HIGH RELIABILITY", Category=Transistors, ComponentLink1Description=https://datasheet.ciiva.com:443/pdfs/VipMasterIC/IC/NEXP/NEXP-S-A0003107917/NEXP-S-A0003107917-1.pdf?src-supplier=IHS+Markit, ComponentLink1URL=https://datasheet.ciiva.com:443/pdfs/VipMasterIC/IC/NEXP/NEXP-S-A0003107917/NEXP-S-A0003107917-1.pdf?src-supplier=IHS+Markit, FET Technology="METAL-OXIDE SEMICONDUCTOR", JEDEC-95 Code=MO-235, Manufacturer Part Number=PSMN1R2-25YLDX, Number of Elements=1, Pins=4, Polarity/Channel Type=N-CHANNEL, Pricing="1=0.7, 10=0.694, 50=0.694, 100=0.663, 1000=0.483, 10000=0.481 (USD)", Reach SVHC Compliant=No, Reference Standard=IEC-60134, RoHS=Yes, RoHS Compliant=Yes, Stock=20971, Supplier=Mouser, Surface Mount=Yes, Terminal Form="Gull Wing", Terminal Position=SINGLE, Transistor Application=SWITCHING, Transistor Element Material=SILICON
R1 R2 R3 R4 R5 R6 R7 R8 R9 R10 R11 R12 R14 R15 R16 R18 R19 R20 R21 R22 R23 R24 R25 R26 R27 R28 R30 R31 R32 R33 R34 R35 R36 R37: "Resistor"
R13 R17: "Resistor Current Sense Metal Foil 1206 5m Ohm 1% 1W ±50ppm/°C T/R", Manufacturer=Eaton, Manufacturer Part Number=MFSA1206R0050FCM, Supplier Part Number=504-MFSA1206R0050FCM, Temperature Coefficient=50ppm/°C, Category="Chip SMD Resistors", Pricing="1=0.21, 10=0.173, 50=0.173, 100=0.128, 1000=0.096, 10000=0.062 (USD)", RoHS=No, Stock=9199
R38 R39: library part 10K-0.1%, "Fixed Resistor, Thin Film, 0.1W, 10000ohm, 75V, 0.1% +/-Tol, 25ppm/Cel, Surface Mount, 0603", Case/Package=0603, Manufacturer=Yageo, Manufacturer Part Number=RT0603BRD0710KL, Max Operating Temperature=155°C, Min Operating Temperature=-55°C, Package Height=0.45mm, Package Length=1.6mm, Package Style=SMTMeter, Package Width=0.8mm, Rated Temperature=70°C, Resistor Type="FIXED RESISTOR", Supplier Part Number=603-RT0603BRD0710KL, Temperature Coefficient=25ppm/°C, Working Voltage=75V, Category="Chip SMD Resistors", ComponentLink1Description=https://datasheet.ciiva.com:443/pdfs/VipMasterIC/IC/YAGO/YAGO-S-A0008510989/YAGO-S-A0008510989-1.pdf?src-supplier=IHS+Markit, ComponentLink1URL=https://datasheet.ciiva.com:443/pdfs/VipMasterIC/IC/YAGO/YAGO-S-A0008510989/YAGO-S-A0008510989-1.pdf?src-supplier=IHS+Markit, Construction=Chip, Mounting Technology="Surface Mount", Packaging="Tape and Reel", Pins=2, Pricing="1=0.13, 10=0.104, 50=0.083, 100=0.074, 1000=0.05, 10000=0.032 (USD)", Reach SVHC Compliant=Yes, RoHS=Yes, RoHS Compliant=Yes, Stock=42472, Technology="THIN FILM", Termination=Wraparound
SW1 SW2: "PTS526 SMG15J SMTR2 LFS", CompType="DTSM 32N/SMD", Distributor=RET, Note=DIPTRONICS, Order Code=52-01-71, Part Class=Other
U1: "USB-UART Bridge", Manufacturer_Name="Silicon Labs", Mouser Part Number=634-CP2102NA02QFN20R, Arrow Part Number=CP2102N-A02-GQFN20R, Arrow Price/Stock=https://www.arrow.com/en/products/cp2102n-a02-gqfn20r/silicon-labs?utm_currency=USD&region=nac, Datasheet Link=https://www.silabs.com/documents/public/data-sheets/cp2102n-datasheet.pdf, Height=0.8mm, Manufacturer_Part_Number=CP2102N-A02-GQFN20R, Mouser Price/Stock=https://www.mouser.co.uk/ProductDetail/Silicon-Labs/CP2102N-A02-GQFN20R?qs=u16ybLDytRbf2uwPkMBdUg%3D%3D
U2: "Battery Management High-side protector for single-cell li-ion and li-polymer batteries"
U4: "Integrated Circuit", Manufacturer_Name="Texas Instruments", Mouser Part Number=595-LP5907QMFX-3.3Q1, Arrow Part Number=LP5907QMFX-3.3Q1, Arrow Price/Stock=https://www.arrow.com/en/products/lp5907qmfx-3.3q1/texas-instruments, Datasheet Link=http://www.ti.com/lit/gpn/lp5907-q1, Height=1.45mm, Manufacturer_Part_Number=LP5907QMFX-3.3Q1, Mouser Price/Stock=https://www.mouser.co.uk/ProductDetail/Texas-Instruments/LP5907QMFX-3.3Q1?qs=asCBFxFfL1RsL2VYqGFsBQ%3D%3D
U5: library part F280038CPMRQ1, "Automotive C2000™ 32-bit MCU 120-MHz 384-KB flash, FPU, TMU with CLA, AES and CAN-FD", Mfr_Name="Texas Instruments", CompType=TMS320F280038-Q1, Copyright="Copyright (C) 2023 Ultra Librarian. All rights reserved.", Distributor=TI, Manufacturer_Part_Number=F280038PMRQ1, RefDes=RefDes, Type=DEV
U6: "HIGH FREQUENCY HIGH-SIDE AND LOW-SIDE GATE DRIVER", Manufacturer_Name="Diodes Incorporated", Mouser Part Number=621-DGD05473FN-7, Arrow Part Number=DGD05473FN-7, Arrow Price/Stock=https://www.arrow.com/en/products/dgd05473fn-7/diodes-incorporated?region=nac, Datasheet Link=https://www.diodes.com/assets/Datasheets/DGD05473.pdf, Height=0.8mm, Manufacturer_Part_Number=DGD05473FN-7, Mouser Price/Stock=https://www.mouser.co.uk/ProductDetail/Diodes-Incorporated/DGD05473FN-7?qs=W0yvOO0ixfECV6JdMBa%2F6g%3D%3D
U7: "Three Terminal Voltage Reference, 1 Output, 1.24V, Trim/Adjustable, BIPolar, PDSO5", Case/Package=LSSOP, Manufacturer="Texas Instruments", Manufacturer Part Number=TLV431CDBVR, Max Operating Temperature=70°C, Max Output current=10mA, Max Output Voltage=1.258V, Max Supply Voltage=6V, Min Operating Temperature=0°C, Min Output Voltage=1.222V, Min Supply Voltage=1.24V, Package Body Material=Plastic, Package Equivalence Code=TSOP5/6,.11,37, Package Shape=Rectangular, Package Style="SMALL OUTLINE, LOW PROFILE, SHRINK PITCHMeter", Peak Reflow Temperature (Cel)=260°C, Supplier Part Number=595-TLV431CDBVR, Temp Coef of Voltage-Max=138.249ppm/°C, Temperature Grade=COMMERCIAL, Category="Voltage References", Channels=1, ComponentLink1Description=https://www.ti.com:443/lit/ds/symlink/tlv431.pdf?src-supplier=IHS+Markit, ComponentLink1URL=https://www.ti.com:443/lit/ds/symlink/tlv431.pdf?src-supplier=IHS+Markit, ComponentLink2Description=https://datasheet.ciiva.com/4065/29560336s9640988n7713-4065870.pdf?src-supplier=Arrow+Electronics, ComponentLink2URL=https://datasheet.ciiva.com/4065/29560336s9640988n7713-4065870.pdf?src-supplier=Arrow+Electronics, ComponentLink3Description=https://datasheet.ciiva.com/2006/tlv431a-2006342.pdf?src-supplier=Digikey, ComponentLink3URL=https://datasheet.ciiva.com/2006/tlv431a-2006342.pdf?src-supplier=Digikey, ComponentLink4Description=https://datasheet.ciiva.com/2006/tlv431a-2006343.pdf?src-supplier=Digikey, ComponentLink4URL=https://datasheet.ciiva.com/2006/tlv431a-2006343.pdf?src-supplier=Digikey, ComponentLink5Description=https://datasheet.ciiva.com/2006/tlv431a-2006344.pdf?src-supplier=Digikey, ComponentLink5URL=https://datasheet.ciiva.com/2006/tlv431a-2006344.pdf?src-supplier=Digikey, Height - Seated (Max)=1.45mm, JESD-30 Code=R-PDSO-G5, JESD-609 Code=e4, Length=2.9mm, Moisture Sensitivity Level=1, Nominal Output Voltage=1.24V, Number of Outputs=1, Pins=5, Pricing="1=0.34, 10=0.274, 50=0.274, 100=0.203, 1000=0.138, 10000=0.137 (USD)", Qualification Status="Not Qualified", Reach SVHC Compliant=Yes, RoHS=Yes, RoHS Compliant=Yes, Stock=5017, Supplier=Mouser, Surface Mount=Yes, Technology=BIPOLAR, Terminal Finish=Nickel, Terminal Form="Gull Wing", Terminal Pitch=0.95mm, Terminal Position=DUAL, Throw Configuration="THREE TERMINAL VOLTAGE REFERENCE", Trim/Adjustable Output=Yes, Width=1.6mm
U8: "Operational Amplifier, 1 Func, 500uV Offset-Max, PDSO6", Average Bias Current-Max (IIB)=75uA, Case/Package=SOP, Input Offset Voltage-Max=500uV, Manufacturer="Texas Instruments", Manufacturer Part Number=INA181A1IDBVR, Max Operating Temperature=125°C, Min Operating Temperature=-40°C, Nominal Supply Voltage=5V, Package Body Material=Plastic, Package Shape=Rectangular, Package Style="SMALL OUTLINEMeter", Peak Reflow Temperature (Cel)=260°C, Supplier Part Number=595-INA181A1IDBVR, Supply Voltage Limit-Max=5.5V, Temperature Grade=AUTOMOTIVE, Amplifier Type="OPERATIONAL AMPLIFIER", Category="Amplifiers - Op Amps, Buffer, Instrumentation", Channels=1, Common-mode Reject Ratio-Nom=100dB, ComponentLink1Description=https://www.ti.com:443/lit/ds/symlink/ina181.pdf?src-supplier=IHS+Markit, ComponentLink1URL=https://www.ti.com:443/lit/ds/symlink/ina181.pdf?src-supplier=IHS+Markit, ComponentLink2Description=http://www.ti.com/lit/ds/symlink/ina181.pdf?src-supplier=Digikey, ComponentLink2URL=http://www.ti.com/lit/ds/symlink/ina181.pdf?src-supplier=Digikey, JESD-30 Code=R-PDSO-G6, JESD-609 Code=e3, Moisture Sensitivity Level=1, Pins=6, Pricing="1=0.43, 10=0.256, 50=0.256, 100=0.198, 1000=0.169, 10000=0.147 (USD)", Reach SVHC Compliant=Yes, RoHS=Yes, RoHS Compliant=Yes, Slew Rate=2V/µs, Stock=103029, Supplier=Mouser, Surface Mount=Yes, Terminal Finish=Tin, Terminal Form="Gull Wing", Terminal Position=DUAL, Unity Gain BW-Nom=350kHz

## Via types
v1: diameter 1, hole 0.5, Top Layer to Bottom Layer, 12 vias
v2: diameter 0.6, hole 0.3, Top Layer to Bottom Layer, 1 vias

## Nets (pads, with @x,y where several pads share a name; then routed paths per layer and width w, separated by ;. In a path a pad name is that pad's centre, name@x,y a point inside that pad or via, vN(x,y) a via of type N, cw(c..) or ccw(c..) an arc to the next point about the centre after c; other vN are vias at no path point)
+1V2: C16.2 C17.2 C18.2 C21.2 U5.4 U5.27 U5.44 U5.59
+3V3: C5.2 C6.1 C10.2 C23.2 C24.2 C25.2 C26.2 D2.2 D3.2 J6.1 JP2.2 L2.1 R4.1 R18.2 R19.2 R20.2 R21.2 R22.2 R23.2 R26.2 R31.2 R37.1 U1.6 U1.7 U5.28 U5.43 U5.60 U8.6 | length 18.9
  Top Layer w0.254: U1.7 117.375,179.448 117.398,179.425 U1.6 118.173,179.723 118.173,179.725 118.673,180.225 v1(118.875,180.225)
  Top Layer w0.6: 53.375,82.525 53.375,80.525 54.7,79.2 61.8,79.2 v1(62.5,79.9) R37.1 ; R37.1@62.525,81.3 62.875,81.65 U8.6 ; 120.15,166.775 121.695,166.775 C10.2
+3V3A: C22.2 C33.2 L2.2 U5.22
+5V: C11.2 C12.2 C13.2 C14.2 J2.1 J4.1 J5.1 Q2.3 R15.2 R24.2 R30.2 U3.3 U3.5 | length 5.3
  Top Layer w0.254: U3.3 114.035,166.077 114.282,166.077 114.855,165.504 114.855,165.431 ; v1(114.85,164.55) 114.855,164.555 114.855,165.431 ; U3.5 115.024,165.6 114.855,165.431
  Top Layer w0.5: R15.2 114.19,164.025 114.715,164.55 v1(114.85,164.55)
AGND: C19.1 C20.1 C22.1 C28.1 C29.1 C30.1 C31.1 C32.1 C33.1 NT1.2 R27.1 R28.1 R39.1 U5.17 U5.21 U7.2 U7.5 U8.2 | length 9.4
  Top Layer w0.6: R39.1 56.7,80.85 U7.5 58.525,80.85 59.475,81.8 U7.2 ; v1(65.5,80.525) 65.5,82.229 65.871,82.6 U8.2
  Top Layer w1: v1(54.875,80.975) 54.925,81.025 R39.1
BOOT0: R19.1 U5.40
BOOT1: JP1.1 R26.1 U5.35
D+: D1.3 J1.3 U1.4 | length 24.2
  Top Layer w0.254: U1.4@118.609,178.425 120.95,178.425 125.4,178.425 126.2,177.625 127.6,176.225 128.975,176.225 129.6,176.85 129.6,180.725 128.8,181.525 125.25,181.525 124.57,180.845 D1.3
D-: D1.4 J1.2 U1.5 | length 15.3
  Top Layer w0.254: U1.5 118.183,178.933 120.45,178.933 ; D1.4 121.977,182.432 121.977,181.928 121.736,181.686 120.837,181.686 120.45,181.299 120.45,178.933 ; 128.2,177.625 126.892,178.933 120.45,178.933
"Gate EN": R36.1 U5.50 U6.6
"Gate High": U5.52 U6.7
"Gate Low": U5.51 U6.8
Gate_Common: C34.1 L1.1 Q2.2 Q3.3 U6.5 | length 4.5
  Top Layer w1: 44.62,104.7 Q2.2@44.62,106.15 ; 45.874,104.659 45.874,106.134 Q2.2@45.89,106.15 ; 47.16,104.6 Q2.2@47.16,106.15
Gate_High: Q2.1 R34.2 | length 3
  Top Layer w1: Q2.1 49.875,107.595 v1(49.875,108.525)
Gate_Low: Q3.1 R35.2 | length 1.4
  Top Layer w1: v1(49.725,110.125) 51.07,110.125 Q3.1
GND: C1.1 C2.1 C3.2 C4.1 C5.1 C6.2 C8.1 C9.1 C10.1 C11.1 C12.1 C13.1 C14.1 C15.1 C16.1 C17.1 C18.1 C21.1 C23.1 C24.1 C25.1 C26.1 C27.2 C35.1 CN1.3 D1.6 D4.1 D5.1 J1.4 J2.2 J3.2 J4.4 J4.5 J5.2 J6.3 J6.5 J6.7 J6.9 JP1.2 NT1.1 Q3.2 R1.1 R6.1 R7.1 R12.1 R13.2 R16.1 R36.2 SW1.1 U1.3 U1.12 U1.21 U2.4 U3.1 U4.2 U5.5 U5.26 U5.45 U5.46 U5.58 U6.9 U6.11 | length 31.5
  Top Layer w0.254: U2.4 79.605,77.8 79.706,77.901 ; U3.1 114.1,167.1 114.123,167.123 114.123,168.273 v1(114.25,168.4)
  Top Layer w0.5: 79.706,77.901 v1@80.225,78.42
  Top Layer w0.6: C8.1 79.74,81.453 80.051,81.764 81.206,81.764 R12.1 ; R16.1 112.775,168.425 114.225,168.425 v1(114.25,168.4) ; U4.2 118.549,165.825 118.9,166.176 ; C9.1 118.9,163.38 118.9,166.176 ; C10.1 121.665,168.085 118.935,168.085 v1(118.9,168.05) 118.9,166.176
  Top Layer w1: Q3.2@52.39,110.175 52.39,115.61 ; Q3.2@53.66,110.175 53.66,115.549 ; Q3.2@54.93,110.175 54.93,115.689
  other v1: 80.225,78.425
NetC1_2: C1.2 J1.0 R1.2
NetC7_2: C7.2 R8.1 U2.2 | length 3
  Top Layer w0.254: U2.2 78.25,76.753 78.25,76.644 78.5,76.394
  Top Layer w0.5: 78.5,76.378 R8.1@79.127,75.75 ; R8.1 C7.2@80.64,75.5
NetC8_2: C8.2 R11.1 R12.2 U2.5 | length 4.9
  Top Layer w0.254: U2.5@78.752,78.623 78.794,78.623 79.22,79.05
  Top Layer w0.5: 79.22,79.05 79.647,79.476 C8.2@79.647,79.835 ; C8.2 79.76,80.198 81.14,80.198 R12.2 R11.1
NetC34_2: C34.2 D6.1 U6.3
NetC35_2: C35.2 R33.1 U6.1
NetD2_1: D2.1 R3.2
NetD3_1: D3.1 R5.2
NetD4_2: D4.2 R31.1
NetD5_2: D5.2 R32.1
NetD6_2: D6.2 R33.2
NetJP2_1: JP2.1 U4.5
NetQ1_2: Q1.2 U2.8 | length 3.2
  Top Layer w0.5: Q1.2 U2.8@77.55,77.8
NetQ1_4: Q1.4 U2.7 | length 3.6
  Top Layer w0.5: Q1.4 77.125,79.1 U2.7
NetR3_1: R3.1 U1.19
NetR4_2: R4.2 U1.9 | length 3.9
  Top Layer w0.254: R4.2 114.282,181.568 114.282,181.093 114.545,180.83 116.02,180.83 116.375,180.475 U1.9
NetR5_1: R5.1 U1.20
NetR7_2: R7.2 U1.11 | length 2.4
  Top Layer w0.254: R7.2 114.825,179.975 U1.11
NetR9_1: R9.1 U2.1 | length 2.4
  Top Layer w0.254: R9.1 U2.1
  Top Layer w0.5: R9.1@77.775,75.5 77.775,76.313
NetR10_1: R10.1 U2.6 | length 1.7
  Top Layer w0.254: U2.6@78.25,78.548 78.25,79.175
  Top Layer w0.5: R10.1 78.25,80.258 78.25,79.175
NetR15_1: R15.1 R16.2 U3.4 | length 2.7
  Top Layer w0.254: R15.1 112.825,165.6 U3.4
  Top Layer w0.5: R15.1 R16.2
NetR30_1: R30.1 R32.2
NetR34_1: R34.1 U6.4
NetR35_1: R35.1 U6.10
NetR38_1: R38.1 R39.2 U7.4 | length 3.1
  Top Layer w0.6: R38.1@54.9,82.525 R39.2 ; R39.2@56.775,82.75 U7.4
Path_Status: R14.2 U3.8 | length 2.8
  Top Layer w0.254: U3.8@115.682,167.107 U3.8 R14.2@115.688,168.438
  Top Layer w0.5: R14.2@115.688,168.438 R14.2 v1(115.7,169.9)
"Read 5V": C19.2 C29.2 R24.1 R27.2 U5.25
"Read Battery": C20.2 C30.2 R25.1 R28.2 U5.24
"Read Current": C31.2 U5.23 U8.1 | length 1.4
  Top Layer w0.6: U8.1 68.075,81.65 v1(68.125,81.6)
"Read Ref": C32.2 R37.2 R38.2 U5.20 U7.3 U8.5 | length 3.6
  Top Layer w0.6: U7.3 62.45,82.75 62.5,82.8 62.525,82.8 62.725,82.6 U8.5
SERIAL_RX: CN1.2 U1.18 U5.2
SERIAL_TX: CN1.1 U1.17 U5.1
"System Reset": R11.2 SW2.2 U5.63
TCK: J6.4 R23.1 U5.36
TDI: J6.8 R20.1 U5.39
TDO: J6.6 R22.1 U5.37
TMS: J6.2 R21.1 U5.38
Vbatt+: J7.1 Q1.1 R8.2 R9.2 SW2.1 | length 5.2
  Top Layer w0.51: 72.9,77.175 72.925,77.15 Q1.1
  Top Layer w1: 75.675,73.975 75.7,74 R9.2 R8.2
Vbatt-: C7.1 J7.2 R13.1 U2.3 | length 66.3
  Top Layer w0.254: U2.3@78.75,77.083 80.025,77.083
  Top Layer w3: R13.1 88.73,71.07
  Top Layer w5: 88.73,71.07 99.073,60.727
  Top Layer w10: 99.073,60.727 122.536,60.727 ; 121.75,39.243 121.75,59.941 122.704,60.895
Vbus: C4.2 R2.1 R6.2 U1.8 | length 5.1
  Top Layer w0.254: C4.2@115.525,181.625 116.825,181.625 R6.2@116.875,181.675 ; U1.8 R6.2@116.875,181.675 ; R2.1 R6.2 R6.2@116.875,181.675
Vim: L1.2 R17.1 U8.4 | length 4.1
  Top Layer w0.3: R17.1 64.175,86.075 64.924,86.075 65.1,85.899 65.1,84.45 64.625,83.975 64.625,83.7 64.475,83.55 U8.4
  Top Layer w1: L1.2 L1.2@61.9,86.075
  Top Layer w2: L1.2 L1.2@61.875,86.15
Vip: C15.2 J3.1 Q1.3 R10.2 R17.2 R25.2 U3.6 U8.3 | length 9
  Top Layer w0.3: U8.3 66.425,83.55 66.275,83.7 66.275,83.975 65.975,84.275 65.975,85.999 66.151,86.175 66.875,86.175 R17.2 v2(68.525,86.15)
  Top Layer w0.5: 72.975,78.45 Q1.3
  Top Layer w0.6: 76.175,81.8 76.192,81.783 R10.2
VREFHI: C28.2 U5.6 U5.7 U5.8 U5.16
Vswitch: C9.2 R14.1 U3.2 U3.7 U4.1 U4.3 | length 10
  Top Layer w0.254: U3.2 U3.7 116.432,166.6
  Top Layer w0.5: R14.1 117.2,168.425 117.65,167.975 U4.1 116.607,166.775 116.432,166.6 116.432,165.203 116.759,164.875 U4.3
  Top Layer w0.6: C9.2 117.53,164.875 U4.3
Vusb: C2.2 C3.1 D1.1 J1.1 R2.2 | length 5.8
  Top Layer w0.254: D1.1 121.023,180.822 121.023,180.318 121.245,180.096 126.171,180.096 126.2,180.125
XRSN: C27.1 R18.1 SW1.2 U5.3
pads on no net: D1.2 D1.5 J4.2 J4.3 J5.3 J6.10 Q1.5 Q1.6 Q1.7 Q1.8 SW1.3 SW2.3 U1.1 U1.2 U1.10 U1.13 U1.14 U1.15 U1.16 U4.4 U5.9 U5.10 U5.11 U5.12 U5.13 U5.14 U5.15 U5.18 U5.19 U5.29 U5.30 U5.31 U5.32 U5.33 U5.34 U5.41 U5.42 U5.47 U5.48 U5.49 U5.53 U5.54 U5.55 U5.56 U5.57 U5.61 U5.62 U5.64 U6.2 U7.1

## Polygon pours and split planes (outlines as drawn)
Vip on Top Layer "VIP_L01_P005" (solid, pour order 5): 76.775,80.175 73.675,79.575 73.675,78.125 72.375,78.125 72.375,79.575 69.275,80.175 69.275,82.425 67.525,84.1 66.225,84.575 66.216,87.353 64.148,89.42 37.575,89.42 36.823,90.172 36.823,95.776 37.571,96.525 64.353,96.528 66.775,98.95 66.775,105.925 68.025,107.175 75.525,107.175 76.775,105.925
Vbatt+ on Top Layer "VBATT+_L01_P007" (solid, pour order 7): 69.275,76.175 72.375,76.675 72.375,77.55 73.675,77.55 73.675,76.675 76.775,76.175 76.775,71.7 76.751,62.424 70.227,55.9 56.775,55.9 55.486,54.611 55.475,35.448 53.325,33.298 47.625,33.298 45.475,35.448 45.475,63.8 47.625,65.9 65.975,65.9 69.275,69.2
Gate_Common on Top Layer "GATE_COMMON_L01_P004" (solid, pour order 4): 44.075,105.3 44.1,105.325 49.125,105.325 50.82,108.55 63.1,108.55 65.717,105.933 65.717,99.367 63.818,97.468 47.875,97.475 44.075,101.428
+5V on Top Layer "+5V_L01_P002" (solid, pour order 2): 88.975,124.8 88.975,119.775 87.75,118.55 49.725,118.55 48.225,117.3 48.225,112.8 48.587,112.735 48.659,107.772 37.575,107.775 36.4,108.95 36.398,112.032 37.575,113.212 41.188,113.213 42.3,114.325 42.3,117.425 41.142,118.708 41.225,123.275 42.625,126.025 87.75,126.025
GND on Top Layer "GND_L01_P003" (solid, pour order 3): 77.7,110.55 75.525,108.375 68.025,108.375 65.85,110.55 57.05,110.55 55.975,111.3 49.975,111.25 49.975,112.975 48.725,114.3 48.725,117.05 49.975,118.05 87.75,118.05 88.975,116.825 88.975,111.775 87.75,110.55

## Silkscreen, mask and mechanical layers (free items; w line width, h text height)
Top Overlay:
  text "5V OUT" at 103.8,126.041 h1.52 r180
  text "USB IN" at 121.162,125.816 h1.52 r180
  text "5V IN" at 26.109,124.95 h1.52 r270
  text "HIGH SIDE" at 26.109,112.975 h1.52 r270
  text "LOW SIDE" at 26.109,96.931 h1.52 r270
  text "BATT IN" at 26.109,80 h1.52 r270